# EAGLE board audioplayer (EAGLE 5.07)
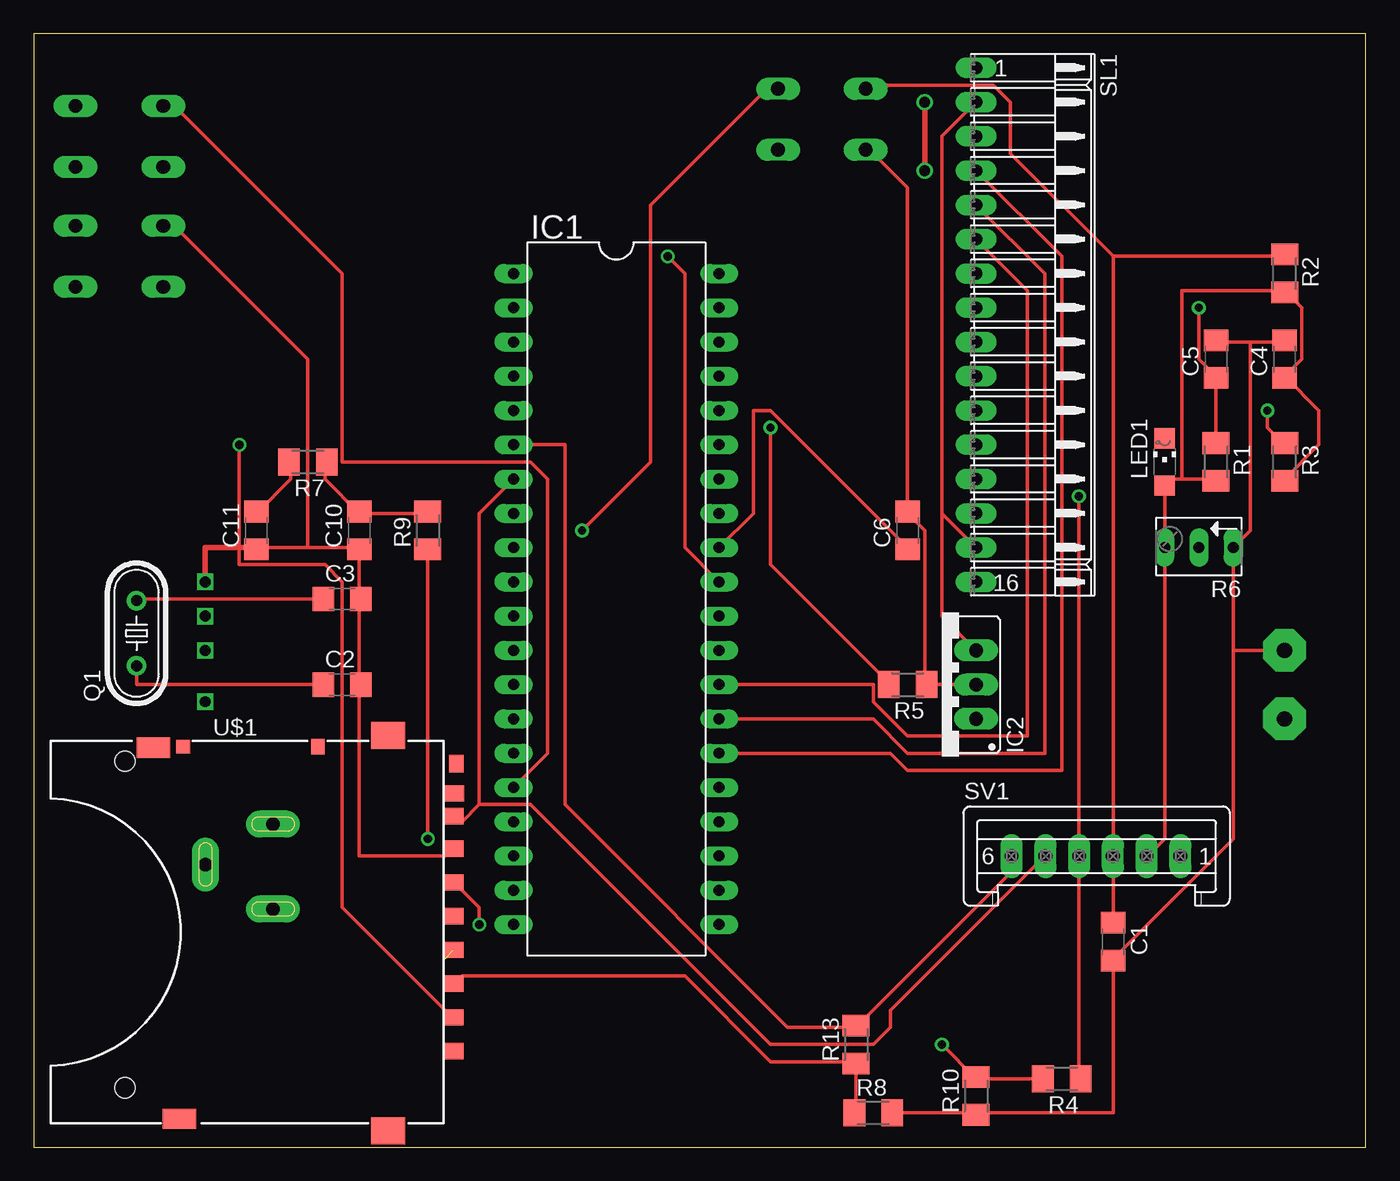
[diagram p0: board, top side]
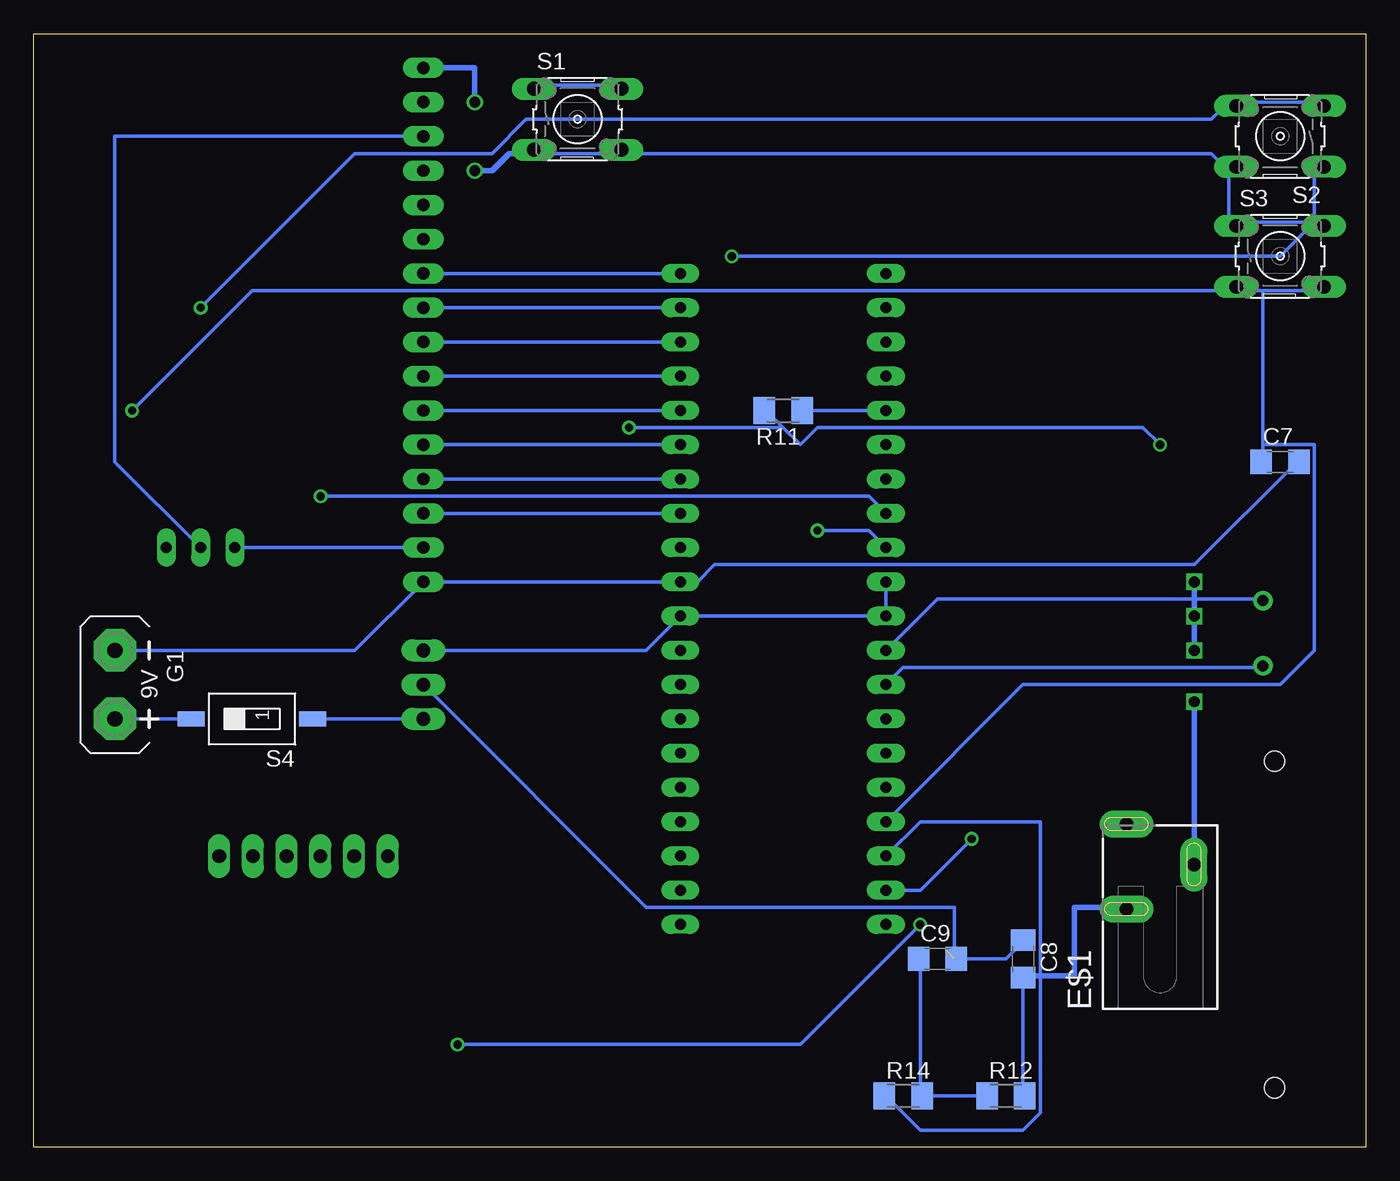
[diagram p1: board, bottom side, seen from below]

Size 98.73 x 82.54 mm. Coordinates in mm from the lower left corner, seen from the top.
Outline: 0,0 98.73,0 98.73,82.54 0,82.54 0,0
Copper layers (1*16): Top 0.035mm / dielectric 1.5mm / Bottom 0.035mm
Design rules "default *": minimum track width 10mil, minimum drill 24mil, track to track 8mil, track to pad 8mil, pad to pad 8mil, via to via 8mil, smd to smd 8mil, copper to edge 40mil, drill to drill 8mil, minimum pad ring 12mil, minimum via ring 8mil, stop-mask expansion 4mil, vias tented up to drill 0mil, thermal gap 10mil

## Footprints (pad centres in the part's own frame; a part is rotated, then mirrored left to right if it is on the bottom)
C1206 = smd 1.6 x 1.8: 1 -1.4,0; 2 1.4,0
SCD-014-A = drill 1 pad 2 long: 1 -2.5,13.8; 2 -2.5,7.5; 3 2.5,10.8
AB9V = drill 1.118 pad 3.15 octagon: + 0,2.54; - 0,-2.54
DIL40 = drill 0.813 long: 1 -24.13,-7.62; 2 -21.59,-7.62; 3 -19.05,-7.62; 4 -16.51,-7.62; 5 -13.97,-7.62; 6 -11.43,-7.62; 7 -8.89,-7.62; 8 -6.35,-7.62; 9 -3.81,-7.62; 10 -1.27,-7.62; 11 1.27,-7.62; 12 3.81,-7.62; 13 6.35,-7.62; 14 8.89,-7.62; 15 11.43,-7.62; 16 13.97,-7.62; 17 16.51,-7.62; 18 19.05,-7.62; 19 21.59,-7.62; 20 24.13,-7.62; 21 24.13,7.62; 22 21.59,7.62; 23 19.05,7.62; 24 16.51,7.62; 25 13.97,7.62; 26 11.43,7.62; 27 8.89,7.62; 28 6.35,7.62; 29 3.81,7.62; 30 1.27,7.62; 31 -1.27,7.62; 32 -3.81,7.62; 33 -6.35,7.62; 34 -8.89,7.62; 35 -11.43,7.62; 36 -13.97,7.62; 37 -16.51,7.62; 38 -19.05,7.62; 39 -21.59,7.62; 40 -24.13,7.62
78XXS = drill 1.016 long: GND 0,-2.54; IN -2.54,-2.54; OUT 2.54,-2.54
CHIPLED_1206 = smd 1.5 x 1.5: A 0,-1.75; C 0,1.75
HC49/S = drill 0.813 round: 1 -2.413,0; 2 2.413,0
M1206 = smd 1.6 x 2: 1 -1.4,0; 2 1.4,0
B64Y = drill 0.813 long: A 2.54,0; E -2.54,0; S 0,0
B3F-10XX = drill 1.016 long: 1 -3.251,2.261; 2 3.251,2.261; 3 -3.251,-2.261; 4 3.251,-2.261
SMS-001 = smd 1.092 x 2.007: 1 0,-4.496; 2 0,4.496
16PA = drill 0.914 long: 1 -19.05,0; 2 -16.51,0; 3 -13.97,0; 4 -11.43,0; 5 -8.89,0; 6 -6.35,0; 7 -3.81,0; 8 -1.27,0; 9 1.27,0; 10 3.81,0; 11 6.35,0; 12 8.89,0; 13 11.43,0; 14 13.97,0; 15 16.51,0; 16 19.05,0
S06P = drill 1.016 long: 1 6.25,0; 2 3.75,0; 3 1.25,0; 4 -1.25,0; 5 -3.75,0; 6 -6.25,0
SD-MMC_SOCKET-PP = smd 1.2 x 1.5: 1 6.88,29.85; 2 4.38,29.85; 3 1.88,29.85; 4 -0.62,29.85; 5 -3.12,29.85; 6 -5.62,29.85; 7 -8.04,29.85; 8 -9.728,29.87; 9 9.38,29.85 | smd 1.5 x 2.5: 12 -13.1,7.6; 13 14.402,9.525 | smd 2 x 2.5: 14 -14,25; 15 15.3,25 | smd 1.15 x 1: CD -13.18,19.8 | smd 1.3 x 1.1: SW -11.938,30.048 | smd 1 x 1.05: WP -13.18,9.8 | hole 1.5: -12.1,5.5; 12.1,5.5

## Placement (x,y rotation side)
C1  100nF  [C1206]  80.01,15.24 270 top
C2  22p  [C1206]  22.86,34.29 0 top
C3  22p  [C1206]  22.86,40.64 0 top
C4  100nF  [C1206]  92.71,58.42 90 top
C5  100nF  [C1206]  87.63,58.42 90 top
C6  100nF  [C1206]  64.77,45.72 90 top
C7  100nF  [C1206]  6.35,50.8 0 bottom
C8  [C1206]  25.4,13.97 270 bottom
C9  [C1206]  31.75,13.97 0 bottom
C10  [C1206]  24.13,45.72 90 top
C11  [C1206]  16.51,45.72 90 top
E$1  [SCD-014-A]  15.24,10.16 0 bottom
G1  AB9V  [AB9V]  92.71,34.29 180 bottom
IC1  MEGA16-P  [DIL40]  43.18,40.64 270 top
IC2  [78XXS]  67.31,34.29 90 top
LED1  [CHIPLED_1206]  83.82,50.8 0 top
Q1  16MHz  [HC49/S]  7.62,38.1 90 top
R1  10K  [M1206]  87.63,50.8 270 top
R2  [M1206]  92.71,64.77 270 top
R3  10K  [M1206]  92.71,50.8 270 top
R4  1K  [M1206]  76.2,5.08 180 top
R5  2.2K  [M1206]  64.77,34.29 180 top
R6  [B64Y]  86.36,44.45 180 top
R7  [M1206]  20.32,50.8 180 top
R8  2.2K  [M1206]  62.23,2.54 0 top
R9  [M1206]  29.21,45.72 90 top
R10  2.2K  [M1206]  69.85,3.81 90 top
R11  1K  [M1206]  43.18,54.61 180 bottom
R12  [M1206]  26.67,3.81 0 bottom
R13  1K  [M1206]  60.96,7.62 90 top
R14  [M1206]  34.29,3.81 0 bottom
S1  [B3F-10XX]  58.42,76.2 0 bottom
S2  [B3F-10XX]  6.35,74.93 180 bottom
S3  [B3F-10XX]  6.35,66.04 0 bottom
S4  SWS001  [SMS-001]  82.55,31.75 90 bottom
SL1  [16PA]  69.85,60.96 270 top
SV1  [S06P]  78.74,21.59 0 top
U$1  SD_CARD_SOCKETSD  [SD-MMC_SOCKET-PP]  1.27,16.51 270 top

## Library data of the parts
C1-C11 R1-R5 R7-R14 = rcl
E$1 = con-shiua-chyuan
G1 = battery
IC1 = atmel
IC2 = v-reg
LED1 = led
Q1 = crystal
R6 = pot
S1-S3 = switch-omron
S4 = smd-special
SL1 = con-amp-quick
SV1 = con-amp-mt
U$1 = SparkFun

## Nets
+5V: C4.1 IC1.10 IC1.11 IC1.30 IC2.OUT LED1.A R1.2 R2.2 R3.2 R6.A SL1.2 SL1.15 SV1.2
GND: C1.2 C2.2 C3.2 C4.2 C5.2 C6.2 C7.2 C8.1 C9.2 C10.1 C11.1 G1.- IC1.31 IC2.GND R5.1 R6.E R8.2 R10.1 S1.3 S1.4 S2.1 S2.2 S3.1 S3.2 SL1.1 SL1.16 U$1.3 U$1.6
N$2: C11.2 R7.2
N$3: IC1.18 R14.1
N$4: IC1.8 R4.1 SV1.4
N$5: G1.+ S4.2
N$7: R6.S SL1.3
N$8: C1.1 IC1.9 R2.1 S1.1 S1.2 SV1.3
N$9: C2.1 IC1.13 Q1.1
N$10: C9.1 R12.1 R14.2
N$11: C6.1 IC1.32
N$12: IC1.19 R9.1
N$13: C10.2 R7.1 R9.2
N$14: C5.1 IC1.16 R1.1 S2.3 S2.4
N$15: U$1.4
N$16: C8.2 R12.2
N$17: C7.1 IC1.17 R3.1 S3.3 S3.4
N$19: R4.2 R10.2 U$1.5
N$20: IC2.IN S4.1
N$21: R5.2 R11.2 U$1.1
N$22: C3.1 IC1.12 Q1.2
N$23: R8.1 R13.1 U$1.2
N$24: IC1.7 SV1.5 U$1.7
N$26: IC1.6 R13.2 SV1.6
N$27: IC1.5 R11.1
PA0: IC1.40 SL1.7
PA1: IC1.39 SL1.8
PA2: IC1.38 SL1.9
PA3: IC1.37 SL1.10
PA4: IC1.36 SL1.11
PA5: IC1.35 SL1.12
PA6: IC1.34 SL1.13
PA7: IC1.33 SL1.14
PC4: IC1.26 SL1.4
PC5: IC1.27 SL1.5
PC6: IC1.28 SL1.6

## Tracks (layer width: path | path; a pad name or v marks a point on that pad's centre or on a via)
+5V
  Top 0.254: 92.71,57.15 93.98,58.42 93.98,62.23 92.71,63.5 | 92.71,57.15 95.25,54.61 95.25,52.07 92.71,49.53 R3.2 | 92.71,57.15 C4.1 | 85.09,49.53 87.63,49.53 R1.2 | 85.09,49.53 83.82,49.53 LED1.A R6.A 83.82,22.86 82.55,21.59 SV1.2 | SL1.2 67.31,74.93 67.31,46.99 | 67.31,46.99 SL1.15 | IC2.OUT 67.31,39.37 67.31,46.99 | 92.71,63.5 85.09,63.5 85.09,49.53 | 92.71,63.5 R2.2
  Bottom 0.254: IC1.10 IC1.11 IC1.30 53.34,36.83 IC2.OUT | SL1.15 R6.A
GND  (via drill 0.61, 0.8)  (1 unrouted)
  Top 0.254: 63.5,2.54 R8.2 69.85,2.54 | 69.85,2.54 R10.1 | C5.2 87.63,59.69 90.17,59.69 | C4.2 92.71,59.69 90.17,59.69 | 69.85,2.54 80.01,2.54 C1.2 80.01,13.97 88.9,22.86 88.9,36.83 | 90.17,59.69 90.17,45.72 R6.E 88.9,36.83 | G1.- 88.9,36.83 | U$1.6 30.48,21.59 24.13,21.59 24.13,34.29 | 24.13,34.29 C2.2 | IC1.31 48.26,44.45 48.26,64.77 v46.99,66.04 | 24.13,40.64 24.13,34.29 | 24.13,40.64 C3.2 | 24.13,40.64 C10.1 24.13,44.45 20.32,44.45 | C11.1 16.51,44.45 20.32,44.45 | 20.32,44.45 20.32,58.42 10.16,68.58 S3.1 | 62.23,73.66 64.77,71.12 C6.2 64.77,46.99 66.04,45.72 66.04,34.29 R5.1 IC2.GND
  Top 0.406: v66.04,72.39 v66.04,77.47 | 62.23,73.66 S1.3 | 16.51,44.45 12.7,44.45 v12.7,41.91
  Bottom 0.254: C7.2 5.08,50.8 12.7,43.18 48.26,43.18 49.53,41.91 IC1.31 SL1.16 74.93,36.83 G1.- | v46.99,66.04 6.35,66.04 3.81,68.58 | S2.1 3.81,72.39 3.81,68.58 | 3.81,68.58 S3.2 | 3.81,68.58 8.89,68.58 S3.1 10.16,68.58 10.16,72.39 | 10.16,72.39 S2.2 | 10.16,72.39 11.43,73.66 54.61,73.66 S1.4 55.88,73.66 60.96,73.66 S1.3 | IC2.GND 53.34,17.78 30.48,17.78 30.48,13.97 C9.2 26.67,13.97 25.4,15.24 C8.1
  Bottom 0.406: v66.04,72.39 64.77,72.39 63.5,73.66 62.23,73.66 S1.3 | SL1.1 66.04,80.01 v66.04,77.47 | v12.7,41.91 v12.7,39.37 v12.7,36.83
N$2
  Top 0.254: C11.2 16.51,46.99 19.05,49.53 19.05,50.8 R7.2
N$3
  Bottom 0.254: IC1.18 33.02,24.13 24.13,24.13 24.13,2.54 25.4,1.27 33.02,1.27 35.56,3.81 R14.1
N$4  (via drill 0.61)
  Top 0.254: 77.47,21.59 77.47,5.08 R4.1 | v77.47,48.26 77.47,21.59 | 77.47,21.59 SV1.4
  Bottom 0.254: IC1.8 36.83,48.26 v77.47,48.26
N$5
  Bottom 0.254: S4.2 G1.+
N$7
  Bottom 0.254: R6.S 92.71,50.8 92.71,74.93 SL1.3
N$8  (via drill 0.61)
  Top 0.254: 80.01,21.59 C1.1 80.01,16.51 | 80.01,66.04 92.71,66.04 R2.1 | 80.01,66.04 80.01,21.59 | 80.01,21.59 SV1.3 | v40.64,45.72 45.72,50.8 45.72,69.85 54.61,78.74 S1.2 | 80.01,66.04 72.39,73.66 72.39,77.47 71.12,78.74 62.23,78.74 S1.1
  Bottom 0.254: IC1.9 36.83,45.72 v40.64,45.72 | S1.1 60.96,78.74 55.88,78.74 S1.2
N$9
  Top 0.254: 21.59,34.29 C2.1 7.62,34.29 Q1.1
  Bottom 0.254: IC1.13 34.29,35.56 7.62,35.56 Q1.1
N$10
  Bottom 0.254: C9.1 33.02,13.97 33.02,3.81 R14.2 R12.1 27.94,3.81
N$11
  Top 0.254: IC1.32 53.34,46.99 53.34,54.61 54.61,54.61 64.77,44.45 C6.1
N$12  (via drill 0.61)
  Top 0.254: v29.21,22.86 R9.1 29.21,44.45
  Bottom 0.254: v29.21,22.86 33.02,19.05 IC1.19
N$13
  Top 0.254: 24.13,46.99 21.59,49.53 21.59,50.8 R7.1 | 24.13,46.99 29.21,46.99 R9.2 | C10.2 24.13,46.99
N$14  (via drill 0.61)
  Top 0.254: 87.63,52.07 R1.1 C5.1 87.63,57.15 86.36,58.42 v86.36,62.23 | IC1.16 38.1,29.21 38.1,49.53 36.83,50.8 22.86,50.8 22.86,64.77 10.16,77.47 S2.4
  Bottom 0.254: S2.3 3.81,77.47 8.89,77.47 S2.4 10.16,77.47 11.43,76.2 62.23,76.2 64.77,73.66 74.93,73.66 v86.36,62.23
N$16
  Bottom 0.254: 25.4,12.7 C8.2 25.4,3.81 R12.2
  Bottom 0.406: 25.4,12.7 21.59,12.7 21.59,17.78 17.78,17.78
N$17  (via drill 0.61)
  Top 0.254: v91.44,54.61 91.44,53.34 92.71,52.07 R3.1
  Bottom 0.254: 7.62,52.07 7.62,63.5 | 7.62,52.07 7.62,50.8 C7.1 | 7.62,63.5 8.89,63.5 S3.3 10.16,63.5 82.55,63.5 v91.44,54.61 | IC1.17 25.4,34.29 6.35,34.29 3.81,36.83 3.81,52.07 7.62,52.07 | 7.62,63.5 3.81,63.5 S3.4
N$19  (via drill 0.61)
  Top 0.254: v33.02,16.51 33.02,17.78 31.75,19.05 U$1.5 | v67.31,7.62 69.85,5.08 | 69.85,5.08 R4.2 74.93,5.08 | 69.85,5.08 R10.2
  Bottom 0.254: v33.02,16.51 41.91,7.62 v67.31,7.62
N$20
  Bottom 0.254: IC2.IN S4.1
N$21  (via drill 0.61)
  Top 0.254: v15.24,52.07 15.24,43.18 21.59,43.18 22.86,41.91 22.86,17.78 30.48,10.16 U$1.1 | v54.61,53.34 54.61,43.18 63.5,34.29 R5.2
  Bottom 0.254: v15.24,52.07 16.51,53.34 40.64,53.34 41.91,52.07 43.18,53.34 | 43.18,53.34 44.45,54.61 R11.2 | 43.18,53.34 v54.61,53.34
N$22
  Top 0.254: 21.59,40.64 C3.1 7.62,40.64 Q1.2
  Bottom 0.254: IC1.12 31.75,40.64 7.62,40.64 Q1.2
N$23
  Top 0.254: U$1.2 31.75,12.7 48.26,12.7 54.61,6.35 60.96,6.35 R13.1 60.96,2.54 R8.1
N$24
  Top 0.254: 33.02,25.4 31.75,24.13 U$1.7 | 33.02,25.4 33.02,46.99 IC1.7 | 33.02,25.4 36.83,25.4 54.61,7.62 62.23,7.62 63.5,8.89 63.5,10.16 74.93,21.59 SV1.5
N$26
  Top 0.254: 60.96,8.89 72.39,20.32 72.39,21.59 SV1.6 | IC1.6 39.37,52.07 39.37,25.4 55.88,8.89 60.96,8.89 | 60.96,8.89 R13.2
N$27
  Bottom 0.254: IC1.5 R11.1 41.91,54.61
PA0
  Bottom 0.254: IC1.40 SL1.7
PA1
  Bottom 0.254: IC1.39 SL1.8
PA2
  Bottom 0.254: IC1.38 SL1.9
PA3
  Bottom 0.254: IC1.37 SL1.10
PA4
  Bottom 0.254: IC1.36 SL1.11
PA5
  Bottom 0.254: IC1.35 SL1.12
PA6
  Bottom 0.254: IC1.34 SL1.13
PA7
  Bottom 0.254: IC1.33 SL1.14
PC4
  Top 0.254: IC1.26 63.5,29.21 64.77,27.94 76.2,27.94 76.2,66.04 SL1.4
PC5
  Top 0.254: IC1.27 62.23,31.75 64.77,29.21 74.93,29.21 74.93,64.77 SL1.5
PC6
  Top 0.254: IC1.28 62.23,34.29 62.23,33.02 64.77,30.48 73.66,30.48 73.66,63.5 SL1.6
S$2  (via drill 0.8)
  Bottom 0.406: 12.7,20.32 v12.7,33.02